# Altium PCB theMonarchTransmitter.PcbDoc
Units mil, origin at the board's own origin, x right, y up, seen from the top; angles counter-clockwise.
Board outline 3835 x 2085 mil, 4 copper layers (Top Layer, GND, 3.3VDC, Bottom Layer), stack 53.912 mil thick; 35 components, 36 nets, 133 pads, 0 vias.
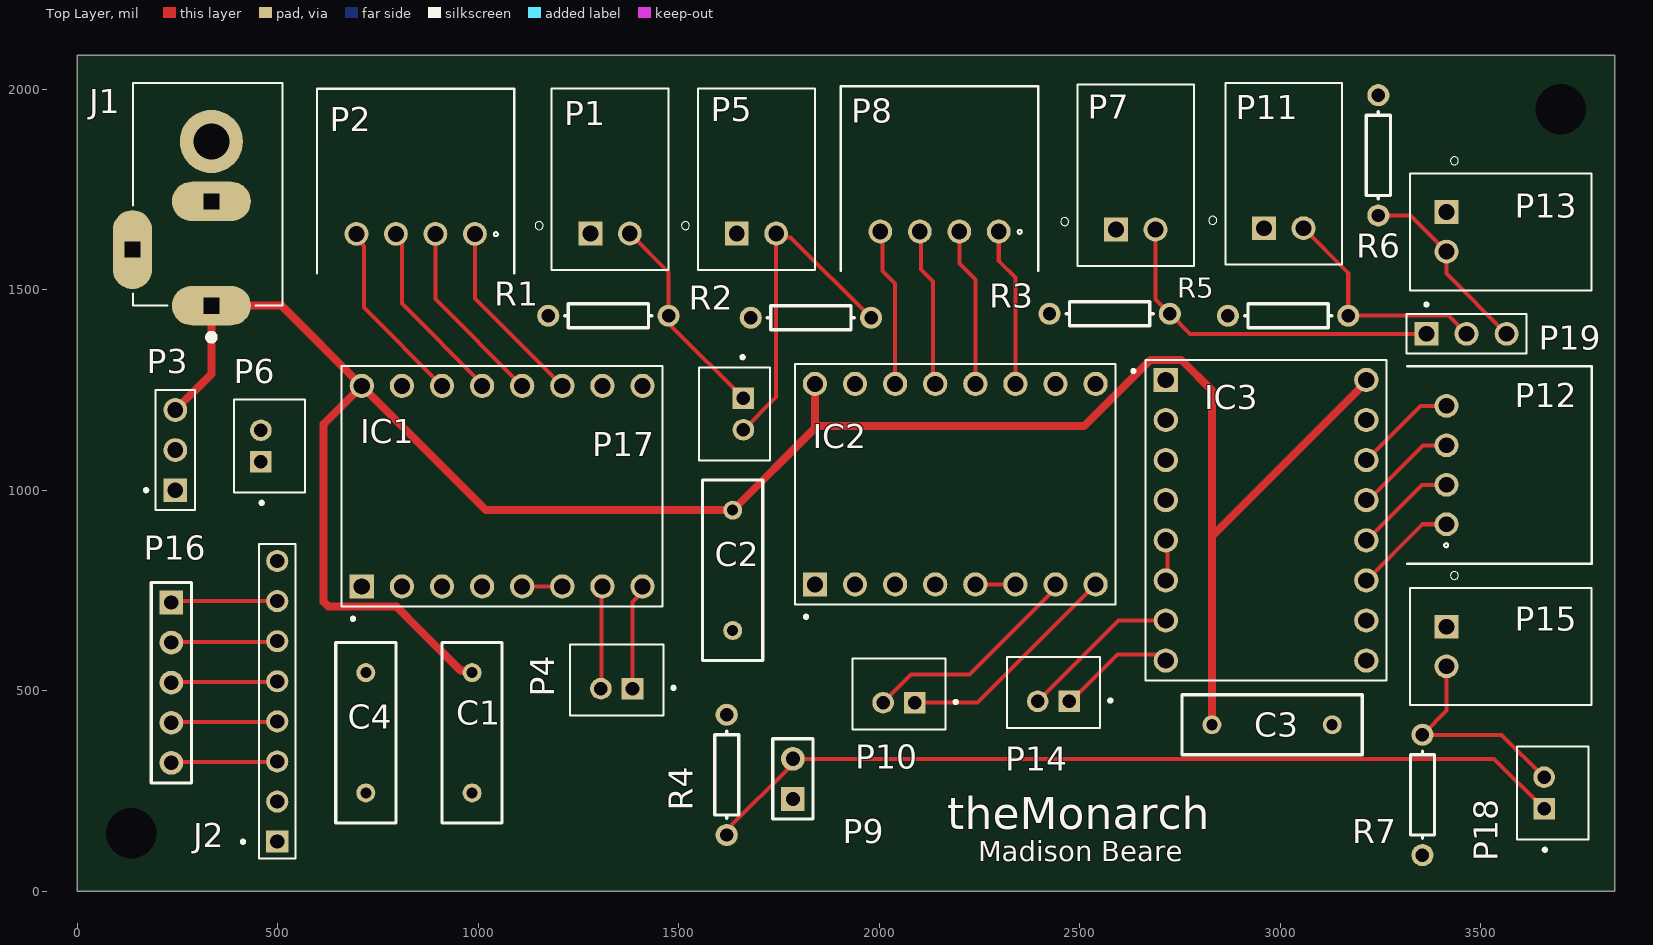
[diagram p0: Top Layer view]
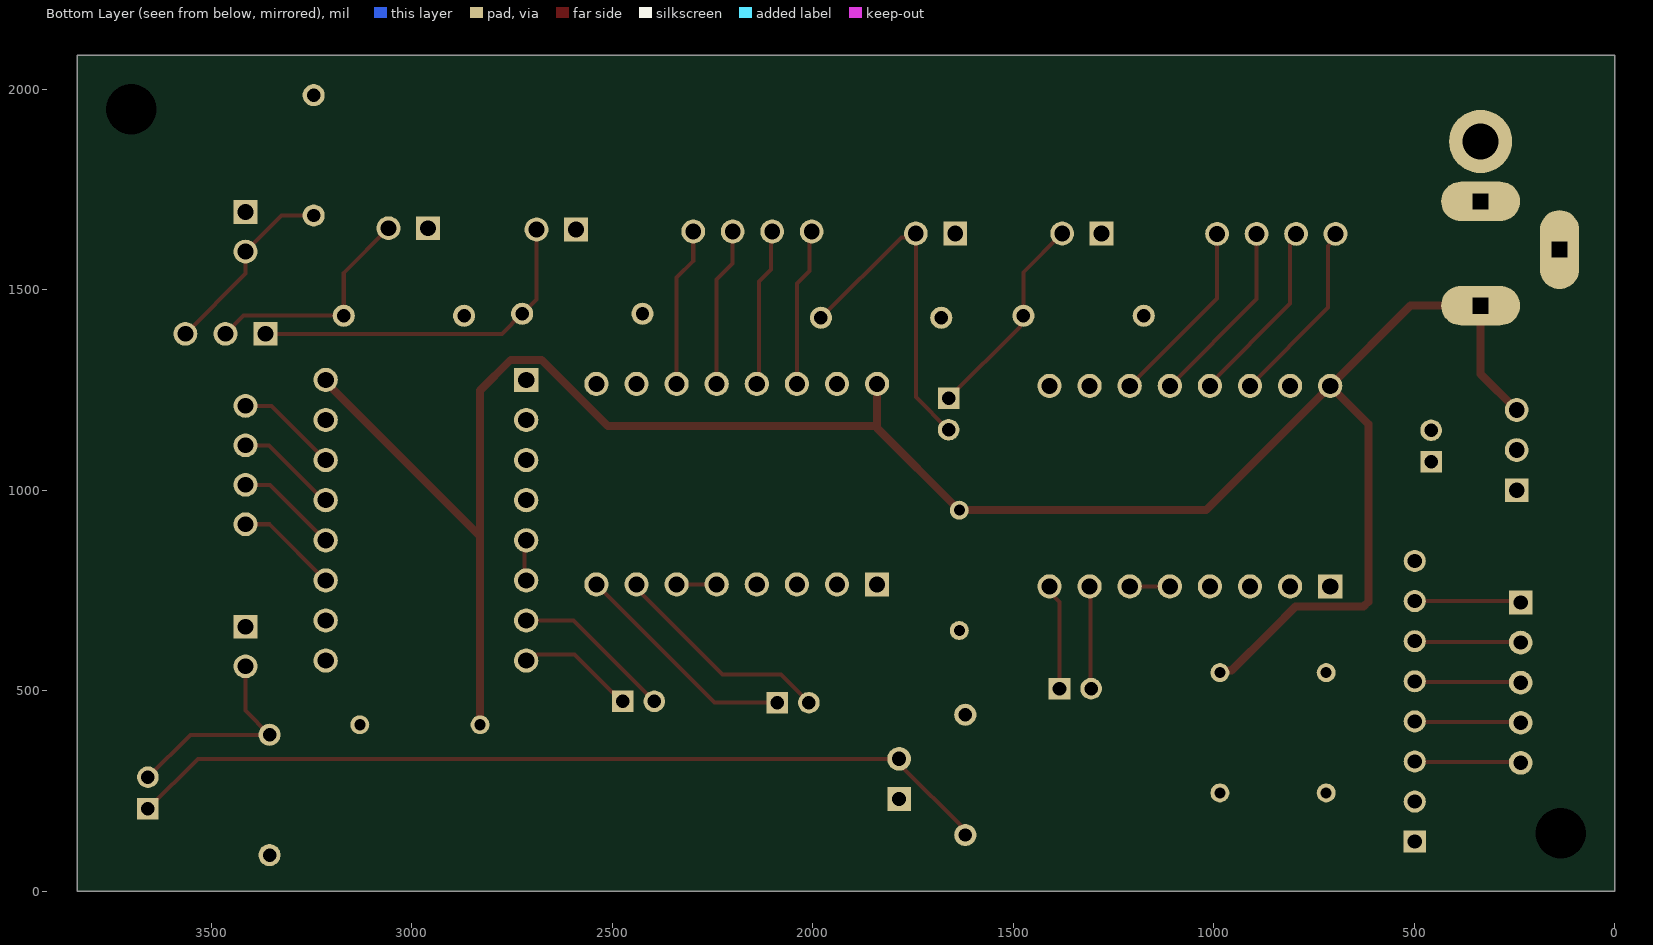
[diagram p1: Bottom Layer view, seen from below]
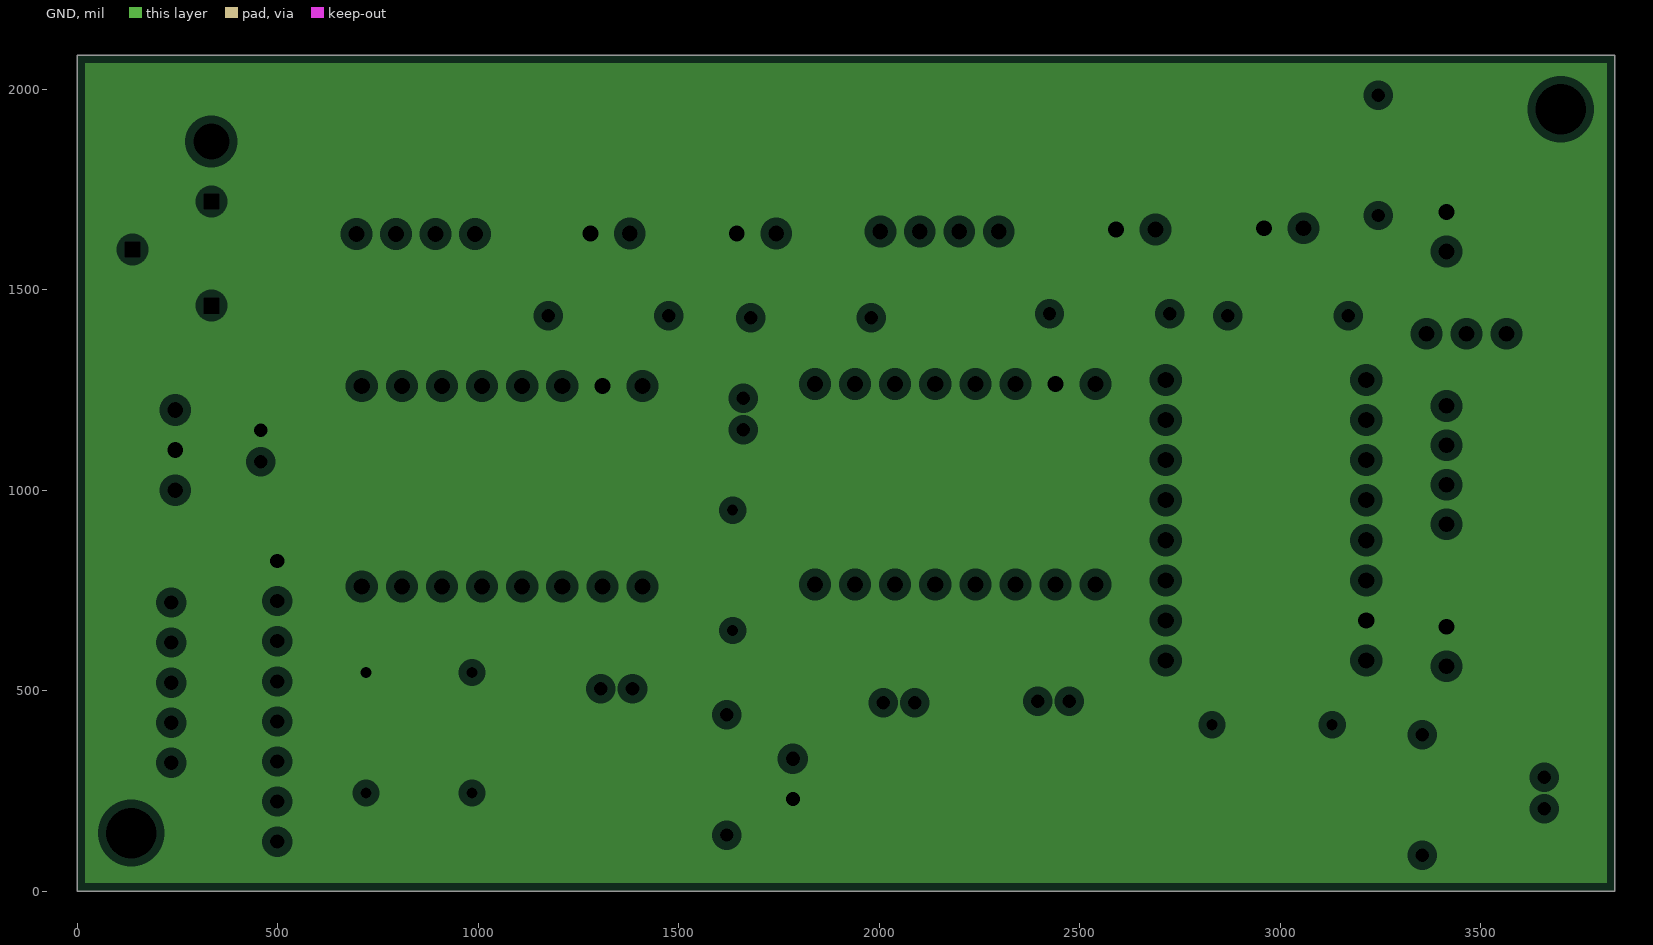
[diagram p2: GND, clearances drawn from the general rule]
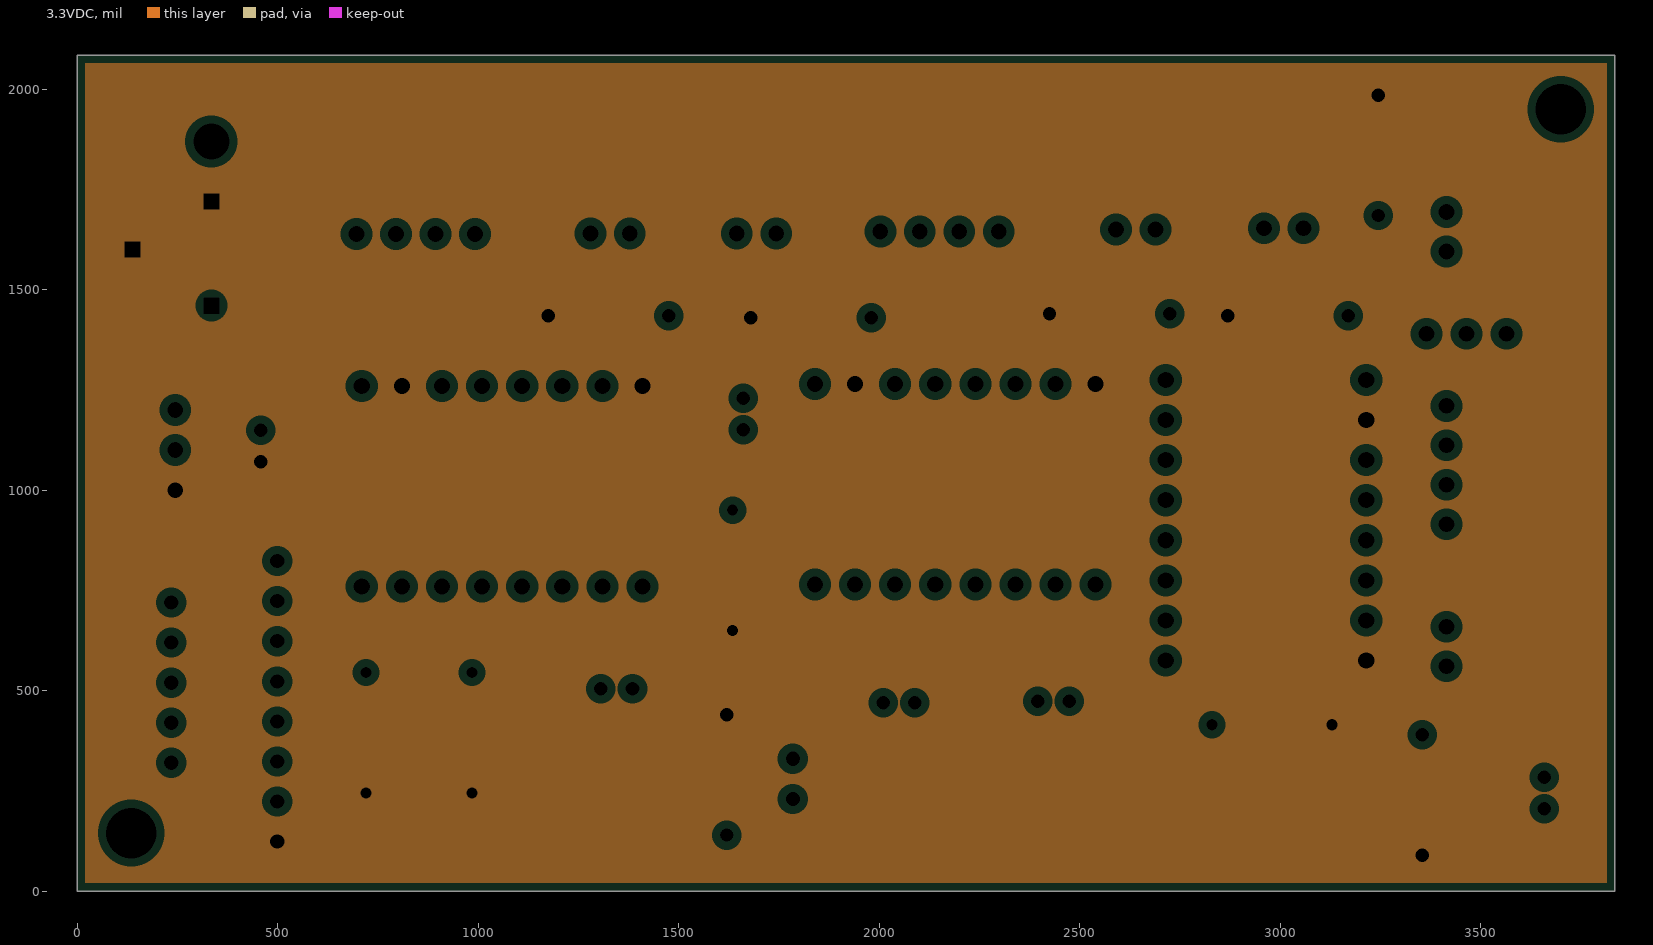
[diagram p3: 3.3VDC, clearances drawn from the general rule]

## Layer stack, top to bottom
Top Solder: solder mask 1, SM-001, Dk 4
Top Layer: signal copper 1.378
Dielectric 1: prepreg 5.1, PP-017, Dk 4.3
Dielectric 2: prepreg 5.1, PP-017, Dk 4.3
GND: plane copper 1.378, net GND
Dielectric 3: core 28, Core-039, Dk 4.8
3.3VDC: plane copper 1.378, net 3.3VDC
Dielectric 4: prepreg 5.1, PP-017, Dk 4.3
Dielectric 5: prepreg 5.1, PP-017, Dk 4.3
Bottom Layer: signal copper 1.378
Bottom Solder: solder mask 1, SM-001, Dk 4

## Board outline
0,0 0,2085 3835,2085 3835,0

## Design rules (kind name [scope] priority, off if disabled: settings)
Clearance [All] p1: gap=10 ignorepadtopadclearanceinfootprint=FALSE except(0: Arc-Hole Track-Hole SMDPad-Hole THPad-Hole Via-Hole Fill-Hole Poly-Hole Region-Hole Text-Hole)
HoleSize [All] p1: absolutevalues=TRUE maxlimit=130 minlimit=1 maxpercent=80.000 minpercent=20.000
PlaneClearance [All] p1: clearance=20
PlaneConnect [All] p1: planeconnectstyle=Relief reliefexpansion=20 reliefentries=4 reliefconductorwidth=10 reliefairgap=10
PolygonConnect [All] p1: connectstyle=Relief reliefconductorwidth=10 reliefentries=4 polygonreliefangle="90 Angle" airgapwidth=10
RoomDefinition theMonarchTransmitter [InComponentClass('theMonarchTransmitter')] p1: confinementstyle=ConfineIn formatcopy=TRUE lockcomponents=FALSE outline 3839.21,2085 -6.42,2085 -6.42,-6.65 3839.21,-6.65
RoutingVias [All] p1: holewidth=11.81 width=23.62 viastyle="Through Hole" minholewidth=11.81 minwidth=23.62 maxholewidth=11.81 maxwidth=23.62
SilkToSolderMaskClearance [IsPad] p1: minsilkscreentomaskgap=7.5 clearancetoexposedcopper=TRUE
SolderMaskExpansion [All] p1: expansion=4 istentingtop=FALSE
Width [All] p1: maxlimit=20 minlimit=10 preferedwidth=10
26 further rules are at their usual default settings.

## Classes and differential pairs
component class theMonarchTransmitter: C1 C2 C3 C4 IC1 IC2 IC3 J1 J2 P1 P2 P3 P5 P6 P7 P8 P9 P11 P12 P13 P15 P16 P17 P18 P19 R1 R2 R3 R4 R5 R6 R7

## Components (designator, comment, footprint, x,y, rotation, side; value= is the part's Value field where it differs from the comment)
C1 "100uF" RAD-0.3 985,395 r270 top value=100pF
C2 "100uF" RAD-0.3 1635,800 r270 top value=100pF
C3 "100uF" RAD-0.3 2980,415 r0 top value=100pF
C4 "10uF" RAD-0.3 720,395 r90 top
IC1 "a4988" MODULE_A4988_STEPPER_MOTOR_DRIVER_CARRIER 1060,1010 r90 top
IC2 "a4988" MODULE_A4988_STEPPER_MOTOR_DRIVER_CARRIER 2190,1015 r90 top
IC3 "a4988" MODULE_A4988_STEPPER_MOTOR_DRIVER_CARRIER 2965,925 r0 top
J1 "FC681478" FC681478 335,1460.16 r90 top
J2 "nRF24L01+" TE_5-146278-8 499.21,473.35 r90 top
P1 "S2B-XH-A" JST_S2B-XH-A(LF)(SN) 1329.21,1640 r0 top
P2 "S4B-XH-A" S4B-XH-A(LF)(SN) 844.37,1638.35 r270 top
P3 "Test" TE_826936-3 245,1100 r90 top
P4 "B2B-PH-K-S" JST_B2B-PH-K-S(LF)(SN) 1345.63,526.65 r0 top
P5 "S2B-XH-A" JST_S2B-XH-A(LF)(SN) 1694.21,1640 r0 top
P6 "B2B-PH-K-S" JST_B2B-PH-K-S(LF)(SN) 480,1110 r270 top
P7 "S2B-XH-A" JST_S2B-XH-A(LF)(SN) 2640,1650 r0 top
P8 "S4B-XH-A" S4B-XH-A(LF)(SN) 2150.79,1644.21 r270 top
P9 "LED" HDR1X2 1785,230 r90 top
P10 "B2B-PH-K-S" JST_B2B-PH-K-S(LF)(SN) 2049.37,491.65 r0 top
P11 "S2B-XH-A" JST_S2B-XH-A(LF)(SN) 3009.21,1653.35 r0 top
P12 "S4B-XH-A" S4B-XH-A(LF)(SN) 3414.21,1062.64 r180 top
P13 "S2B-XH-A" JST_S2B-XH-A(LF)(SN) 3415,1644.21 r270 top
P14 "B2B-PH-K-S" JST_B2B-PH-K-S(LF)(SN) 2435,495 r0 top
P15 "S2B-XH-A" JST_S2B-XH-A(LF)(SN) 3415,610 r270 top
P16 "Header 5" HDR1X5 235,720 r270 top
P17 "2x1 Header" JST_B2B-PH-K-S(LF)(SN) 1640,1190 r90 top
P18 "2x1 Header" JST_B2B-PH-K-S(LF)(SN) 3680,245 r270 top
P19 "3x1 Header" TE_826936-3 3465,1390 r0 top
R1 "Res1" AXIAL-0.3 1325,1435 r180 top value=10K
R2 "Res1" AXIAL-0.3 1830,1430 r180 top value=10K
R3 "Res1" AXIAL-0.3 2575,1440 r180 top value=10K
R4 "Res1" AXIAL-0.3 1620,290 r90 top value=1K
R5 "Res1" AXIAL-0.3 3020,1435 r180 top value=10K
R6 "Res1" AXIAL-0.3 3245,1835 r90 top value=10K
R7 "Res1" AXIAL-0.3 3355,240 r270 top value=10K

## Footprints (in the part's own frame and the unit in brackets; to place one, negate y for a bottom-side part, rotate by r counter-clockwise, add the part's x,y. Pads: shape width x height; smd on the part's side, far side on the other; paste and mask are expansions set on the pad)
AXIAL-0.3 [mm] "Axial Device, Thru-Hole; 2 Leads; 0.3 in Pin Spacing"
  round 1.4 hole 0.85: 1(-3.81,0) 2(3.81,0)
  silkscreen extent -2.77,-0.76 2.77,0.76
FC681478 [mm]
  oval 2.5x5 hole 1 square: 1(0,0) 2(6.6,0)
  round 4 hole 2.3: 1(10.4,0)
  oval 5x2.5 hole 1 square: 3(3.55,5)
  silkscreen extent -2.2,-4.5 14.1,4.95
HDR1X2 [mm] "Connector; Header; 2 Position"
  rect 1.5x1.5 hole 0.9: 1(0,0)
  round 1.5 hole 0.9: 2(2.54,0)
  silkscreen extent -1.27,-1.27 3.81,1.27
HDR1X5 [mm] "Connector; Header; 5 Position"
  rect 1.5x1.5 hole 0.9: 1(0,0)
  round 1.5 hole 0.9: 2(2.54,0) 3(5.08,0) 4(7.62,0) 5(10.16,0)
  silkscreen extent -1.27,-1.27 11.43,1.27
JST_B2B-PH-K-S(LF)(SN) [mm]
  rect 1.368x1.368 hole 0.86: 1(1,-0.55)
  round 1.368 hole 0.86: 2(-1,-0.55)
  silkscreen extent -2.95,-2.25 3.7,2.25
JST_S2B-XH-A(LF)(SN) [mm]
  rect 1.508x1.508 hole 1: 1(-1.25,0)
  round 1.508 hole 1: 2(1.25,0)
  silkscreen extent -4.75,-2.3 3.7,9.2
MODULE_A4988_STEPPER_MOTOR_DRIVER_CARRIER [mm]
  rect 1.53x1.53 hole 1.02: 1(-6.35,8.89)
  round 1.53 hole 1.02: 2(-6.35,6.35) 3(-6.35,3.81) 4(-6.35,1.27) 5(-6.35,-1.27) 6(-6.35,-3.81) 7(-6.35,-6.35) 8(-6.35,-8.89) 9(6.35,-8.89) 10(6.35,-6.35) 11(6.35,-3.81) 12(6.35,-1.27) 13(6.35,1.27) 14(6.35,3.81) 15(6.35,6.35) 16(6.35,8.89)
  silkscreen extent -8.5,-10.16 7.62,10.16
RAD-0.3 [mm] "Radial Cap, Thru-Hole; 2 Leads; 0.3 in Pin Spacing"
  round 1.2 hole 0.7: 1(-3.81,0) 2(3.81,0)
  silkscreen extent -5.71,-1.91 5.71,1.91
S4B-XH-A(LF)(SN) [mm]
  round 1.508 hole 1: 1(-0.02,3.75) 2(-0.02,1.25) 3(-0.02,-1.25) 4(-0.02,-3.75)
  silkscreen extent -9.22,-6.25 2.48,6.25
TE_5-146278-8 [mm]
  rect 1.398x1.398 hole 0.89: 1(-8.89,0)
  round 1.398 hole 0.89: 2(-6.35,0) 3(-3.81,0) 4(-1.27,0) 5(1.27,0) 6(3.81,0) 7(6.35,0) 8(8.89,0)
  silkscreen extent -9.96,-1.17 9.96,2.27
TE_826936-3 [mm]
  rect 1.508x1.508 hole 1: 1(-2.54,0)
  round 1.508 hole 1: 2(0,0) 3(2.54,0)
  silkscreen extent -3.81,-1.25 3.81,1.95

## Part data
C1 C2 C3 C4: library part Cap, "Capacitor", LatestRevisionDate=17-Jul-2002, LatestRevisionNote="Re-released for DXP Platform.", PackageDescription="Radial Cap, Thru-Hole; 2 Leads; 0.3 in Pin Spacing", PackageReference=RAD-0.3, Published=8-Jun-2000, Publisher="Altium Limited"
J1: "CLIFF ELECTRONIC COMPONENTS         FC681478            CONNECTOR, POWER ENTRY, RCPT, 2A, 16VDC", Color=Black, Current Rating=2A, Manufacturer=Cliff, Supplier Part Number 1=2450496, Voltage Rating=16V, Category=Connectors, ComponentLink1Description=https://datasheet.ciiva.com/46428/1859070-46428805.pdf?src-supplier=Element14, ComponentLink1URL=https://datasheet.ciiva.com/46428/1859070-46428805.pdf?src-supplier=Element14, Gender=Male, Length=15.2mm, Manufacturer Part Number=FC681478, Mount="Through Hole", Orientation="Right Angle", Pricing 1="1=1.94000, 50=0.87800, 100=0.78800, 250=0.70300, 500=0.66600, 1000=0.65500 (GBP)", REACH SVHC="No SVHC", RoHS=Yes, Stock 1=534, Supplier 1=Farnell, Termination="Through Hole", Voltage Rating (DC)=16V, Width=9mm
J2: library part WRL-00691, "SPARKFUN TRANSCEIVER BREAKOUT -", Frequency=2.4GHz, Manufacturer=SparkFun, Supplier Part Number 1=1568-1295-ND, Category="RF Semiconductors and Devices", ComponentLink1Description=https://github.com/sparkfun/Transceiver_Breakout-nRF24L01/tree/V_1.3?src-supplier=Digi-Key, ComponentLink1URL=https://github.com/sparkfun/Transceiver_Breakout-nRF24L01/tree/V_1.3?src-supplier=Digi-Key, Manufacturer Part Number=WRL-00691, Pricing 1="1=20.95000 (USD)", RoHS=No, Stock 1=59, Supplier 1=Digi-Key
P1 P5 P7 P9 P11 P13 P15 P17 P18: library part S2B-XH-A(LF)(SN), "Conn Shrouded Header HDR 2 POS 2.5mm Solder RA Thru-Hole Box", Color=Natural, Contact Resistance=20mR, Current Rating=3A, Housing Color=White, Insulation Resistance=1GR, Manufacturer=JST, Max Operating Temperature=85°C, Max Voltage Rating (AC)=250V, Min Operating Temperature=-25°C, Package Quantity=1000, Supplier Part Number 1=455-2257-ND, Category="Headers and Wire Housings", ComponentLink1Description=https://datasheet.ciiva.com/16208/s2b-xh-alfsn-16208978.pdf?src-supplier=Future+Electronics, ComponentLink1URL=https://datasheet.ciiva.com/16208/s2b-xh-alfsn-16208978.pdf?src-supplier=Future+Electronics, ComponentLink2Description=https://datasheet.ciiva.com/8052/1684882-8052211.pdf?src-supplier=Element14, ComponentLink2URL=https://datasheet.ciiva.com/8052/1684882-8052211.pdf?src-supplier=Element14, ComponentLink3Description=https://datasheet.ciiva.com/11746/0900766b8082f560-11746947.pdf?src-supplier=RSComponents, ComponentLink3URL=https://datasheet.ciiva.com/11746/0900766b8082f560-11746947.pdf?src-supplier=RSComponents, ComponentLink4Description=https://datasheet.ciiva.com/26924/getdatasheetpartid-645395-26924076.pdf?src-supplier=Verical, ComponentLink4URL=https://datasheet.ciiva.com/26924/getdatasheetpartid-645395-26924076.pdf?src-supplier=Verical, ComponentLink5Description=https://datasheet.ciiva.com/26894/getdatasheetpartid-640270-26894603.pdf?src-supplier=Verical, ComponentLink5URL=https://datasheet.ciiva.com/26894/getdatasheetpartid-640270-26894603.pdf?src-supplier=Verical, ComponentLink6Description=https://datasheet.ciiva.com/26894/getdatasheetpartid-441330-26894909.pdf?src-supplier=Verical, ComponentLink6URL=https://datasheet.ciiva.com/26894/getdatasheetpartid-441330-26894909.pdf?src-supplier=Verical, ComponentLink7Description=https://datasheet.ciiva.com/20207/523653-20207183.pdf?src-supplier=Rapid+Electronics, ComponentLink7URL=https://datasheet.ciiva.com/20207/523653-20207183.pdf?src-supplier=Rapid+Electronics, ComponentLink8Description=https://datasheet.ciiva.com/726/exh-726412.pdf?src-supplier=Digi-Key, ComponentLink8URL=https://datasheet.ciiva.com/726/exh-726412.pdf?src-supplier=Digi-Key, Connector Type="Male Pin", Contact Material=Brass, Contact Plating=Tin,Copper,Lead, Depth=11.5mm, Gender=Male, Housing Material=Polyamide, Lead Free="Lead Free", Lead Pitch=2.5mm, Length=7.4mm, Manufacturer Part Number=S2B-XH-A(LF)(SN), Max Current Rating=3A, Max Voltage Rating (DC)=250V, Mount="Through Hole", Number of Contacts=2, Number of Positions=2, Number of Rows=1, Orientation="Right Angle", Packaging=Bulk, Pitch=2.5mm, Pricing 1="1=0.18000, 10=0.16800, 100=0.11710, 500=0.09904, 1000=0.08104, 5000=0.07204, 10000=0.06528 (USD)", REACH SVHC="No SVHC", RoHS=Yes, Stock 1=54562, Supplier 1=Digi-Key, Termination=Press-Fit, Voltage Rating=250V, Voltage Rating (AC)=250V, Wire/Cable Gauge=22AWG
P2 P8 P12: library part S4B-XH-A(LF)(SN), "Conn Shrouded Header HDR 4 POS 2.5mm Solder RA Thru-Hole Box", Color=Natural, Contact Resistance=20mR, Current Rating=3A, Housing Color=White, Insulation Resistance=1GR, Manufacturer=JST, Max Operating Temperature=85°C, Max Voltage Rating (AC)=250V, Min Operating Temperature=-25°C, Package Quantity=500, Supplier Part Number 1=455-2243-ND, Category="Headers and Wire Housings", ComponentLink1Description=https://datasheet.ciiva.com/726/exh-726400.pdf?src-supplier=Digi-Key, ComponentLink1URL=https://datasheet.ciiva.com/726/exh-726400.pdf?src-supplier=Digi-Key, ComponentLink2Description=https://datasheet.ciiva.com/26924/getdatasheetpartid-449045-26924078.pdf?src-supplier=Verical, ComponentLink2URL=https://datasheet.ciiva.com/26924/getdatasheetpartid-449045-26924078.pdf?src-supplier=Verical, ComponentLink3Description=https://datasheet.ciiva.com/8052/5448-8052236.pdf?src-supplier=Element14, ComponentLink3URL=https://datasheet.ciiva.com/8052/5448-8052236.pdf?src-supplier=Element14, Connector Type="Male Pin", Contact Material=Brass, Contact Plating=Tin,Lead,Copper, Depth=11.5mm, Gender=Male, Housing Material=Polyamide, Lead Free="Lead Free", Lead Pitch=2.5mm, Length=12.4mm, Manufacturer Part Number=S4B-XH-A(LF)(SN), Max Current Rating=3A, Mount="Through Hole", Number of Contacts=4, Number of Positions=4, Number of Rows=1, Orientation="Right Angle", Packaging=Bulk, Pitch=2.5mm, Pricing 1="1=0.27000, 10=0.25700, 100=0.17850, 500=0.15100, 1000=0.12355, 5000=0.10982, 10000=0.09953 (USD)", REACH SVHC="No SVHC", RoHS=Yes, Stock 1=8950, Supplier 1=Digi-Key, Termination=Press-Fit, Voltage Rating=250V, Voltage Rating (AC)=250V, Wire/Cable Gauge=22AWG
P3 P19: library part Test_Header
P4 P6 P10 P14: library part B2B-PH-K-S(LF)(SN), "Connector Header, PH Series, 2 Position, 2.00mm, Through Hole, Press-Fit, Solder, Natural", Manufacturer=JST, Supplier Part Number 1=455-1704-ND, Category=Connectors, ComponentLink1Description=http://www.farnell.com/datasheets/2057211.pdf?src-supplier=Farnell, ComponentLink1URL=http://www.farnell.com/datasheets/2057211.pdf?src-supplier=Farnell, ComponentLink2Description=http://www.farnell.com/datasheets/2057211.pdf?src-supplier=Newark, ComponentLink2URL=http://www.farnell.com/datasheets/2057211.pdf?src-supplier=Newark, ComponentLink3Description=http://www.farnell.com/datasheets/2057211.pdf?src-supplier=Element14, ComponentLink3URL=http://www.farnell.com/datasheets/2057211.pdf?src-supplier=Element14, Height=0.35inch, Length=0.2inch, Manufacturer Part Number=B2B-PH-K-S(LF)(SN), Pricing 1="1=0.17000, 10=0.16200, 100=0.10020, 500=0.08288, 1000=0.07252, 5000=0.06216, 10000=0.06044 (USD)", RoHS=Yes, Stock 1=37001, Supplier 1=Digi-Key, Weight=0.0625lb, Width=0.24inch
P16: "Header, 5-Pin", LatestRevisionDate=17-Jul-2002, LatestRevisionNote="Re-released for DXP Platform.", Publisher="Altium Limited"
R1 R2 R3 R4 R5 R6 R7: "Resistor", LatestRevisionDate=17-Jul-2002, LatestRevisionNote="Re-released for DXP Platform.", PackageDescription="Axial Device, Thru-Hole; 2 Leads; 0.3 in Pin Spacing", PackageReference=AXIAL-0.3, Published=8-Jun-2000, Publisher="Altium Limited"
IC1 IC2 IC3: ComponentLink1Description="New link"

## Free pads (board coordinates)
  round 60 hole 125.98 unplated: 2(135,145) 3(3700,1950)

## Nets (pads, with @x,y where several pads share a name; then routed paths per layer and width w, separated by ;. In a path a pad name is that pad's centre, name@x,y a point inside that pad or via, vN(x,y) a via of type N, cw(c..) or ccw(c..) an arc to the next point about the centre after c; other vN are vias at no path point)
3.3VDC: C4.2 IC1.10 IC2.10 IC3.10 J2.8 P1.1 P3.2 P5.1 P6.2 P7.1 P9.1 P11.1 P13.1 P15.1
12VDC: C1.1 C2.1 C3.1 IC1.16 IC2.16 IC3.16 J1.1@335,1460.16 P3.3 | length 5702.8
  Top Layer w20: P3.3 335,1290 335,1460.16 509.84,1460.16 IC1.16 ; C1.1 979.79,550.21 955.98,550.21 855.79,650.4 796.19,710 748.52,710 748.4,709.88 626.72,709.88 615,721.6 615,1165 IC1.16 ; 1840,1160 2511.48,1160 2676.6,1325.12 2753.4,1325.12 2830,1248.52 2830,885 ; IC2.16 1840,1155 C2.1 1020,950 IC1.16 ; C3.1 2830,885 ; IC3.16 3215,1270 2830,885
GND: C1.2 C2.2 C3.2 C4.1 IC1.9 IC1.15 IC2.9 IC2.15 IC3.9 IC3.15 J1.2 J1.3 J2.1 P3.1 P6.1 R1.2 R2.2 R3.2 R4.2 R5.2 R6.2 R7.2
NetIC1_5: IC1.5 IC1.6 | length 100
  Top Layer w10: IC1.5 IC1.6
NetIC1_7: IC1.7 P4.2 | length 256.5
  Top Layer w10: P4.2 1308.13,506.87 1308.13,758.13 IC1.7
NetIC1_8: IC1.8 P4.1 | length 265.4
  Top Layer w10: P4.1 1385,721.41 1410,746.41 IC1.8
NetIC1_11: IC1.11 P2.1 | length 469.4
  Top Layer w10: P2.1 992.01,1477.99 IC1.11
NetIC1_12: IC1.12 P2.2 | length 468.8
  Top Layer w10: P2.2 893.58,1476.42 IC1.12
NetIC1_13: IC1.13 P2.3 | length 468.1
  Top Layer w10: P2.3 795.16,1625.77 810,1610.93 810,1465 1010,1265 IC1.13
NetIC1_14: IC1.14 P2.4 | length 467.5
  Top Layer w10: P2.4 696.73,1626.86 715,1608.59 715,1455 IC1.14
NetIC2_5: IC2.5 IC2.6 | length 100
  Top Layer w10: IC2.5 IC2.6
NetIC2_7: IC2.7 P10.2 | length 558.1
  Top Layer w10: P10.2 2080,540 2225,540 2440,755 IC2.7
NetIC2_8: IC2.8 P10.1 | length 573.5
  Top Layer w10: P10.1 2245,470 IC2.8
NetIC2_11: IC2.11 P8.1 | length 397.2
  Top Layer w10: P8.1 2298.43,1571.57 2340,1530 IC2.11
NetIC2_12: IC2.12 P8.2 | length 396.6
  Top Layer w10: P8.2 2200,1565 2240,1525 IC2.12
NetIC2_13: IC2.13 P8.3 | length 395.9
  Top Layer w10: P8.3 2105,1641.57 2105,1550 2135,1520 2135,1270 IC2.13
NetIC2_14: IC2.14 P8.4 | length 395.3
  Top Layer w10: P8.4 2008.17,1639.98 2008.17,1546.83 2040,1515 IC2.14
NetIC3_5: IC3.5 IC3.6 | length 100
  Top Layer w10: IC3.6@2719.21,773.35 IC3.5@2719.21,873.35
NetIC3_7: IC3.7 P14.2 | length 402.9
  Top Layer w10: P14.2 2597.28,675 IC3.7
NetIC3_8: IC3.8 P14.1 | length 295.2
  Top Layer w10: P14.1 2496.3,495.28 2500.28,495.28 2595,590 2686.41,590 2701.41,575 IC3.8
NetIC3_11: IC3.11 P12.1 | length 258
  Top Layer w10: IC3.11 3355,915 P12.1
NetIC3_12: IC3.12 P12.2 | length 257.3
  Top Layer w10: IC3.12 3353.43,1013.43 P12.2
NetIC3_13: IC3.13 P12.3 | length 256.7
  Top Layer w10: IC3.13 3220,975 3356.85,1111.85 P12.3
NetIC3_14: IC3.14 P12.4 | length 256
  Top Layer w10: IC3.14 3350.28,1210.28 P12.4
NetJ2_3: J2.3 P16.5 | length 265.6
  Top Layer w10: P16.5 236.67,321.67 497.54,321.67 J2.3
NetJ2_4: J2.4 P16.4 | length 265.6
  Top Layer w10: P16.4 236.67,421.67 497.54,421.67 J2.4
NetJ2_5: J2.5 P16.3 | length 265.6
  Top Layer w10: P16.3 236.67,521.67 497.54,521.67 J2.5
NetJ2_6: J2.6 P16.2 | length 265.6
  Top Layer w10: P16.2 236.67,621.67 497.54,621.67 J2.6
NetJ2_7: J2.7 P16.1 | length 265.6
  Top Layer w10: P16.1 238.35,723.35 J2.7
NetP1_2: P1.2 P17.1 R1.1 | length 527.9
  Top Layer w10: P1.2 1475,1543.43 R1.1 1483.63,1426.37 1483.63,1407.39 P17.1
NetP5_2: P5.2 P17.2 R2.1 | length 846.8
  Top Layer w10: P17.2 1743.43,1232.4 P5.2 1752.87,1630.55 1779.45,1630.55 R2.1
NetP7_2: P7.2 P19.1 R3.1 | length 885.5
  Top Layer w10: P7.2 2689.21,1475.79 R3.1 2775,1390 P19.1
NetP9_2: P9.2 P18.1 R4.1 | length 2183.2
  Top Layer w10: R4.1 1620,152.21 1785,317.21 P9.2 3533.98,330 P18.1
NetP11_2: P11.2 P19.2 R5.1 | length 578.2
  Top Layer w10: P11.2 3170,1541.77 R5.1 3420,1435 P19.2
NetP13_2: P13.2 P19.3 R6.1 | length 474.4
  Top Layer w10: R6.1 3325,1685 P13.2 3415,1540 P19.3
NetP15_2: P15.2 P18.2 R7.1 | length 542.7
  Top Layer w10: P15.2 3415,450 R7.1 3552.72,390 P18.2
pads on no net: IC1.1 IC1.2 IC1.3 IC1.4 IC2.1 IC2.2 IC2.3 IC2.4 IC3.1 IC3.2 IC3.3 IC3.4 J1.1@335,1869.61 J2.2

## Polygon pours and split planes (outlines as drawn)
no net on Bottom Layer "NONET_L04_P001" (solid, pour order 1): 115,845
3.3VDC on GND (split plane): 3814.9,20.1 20.1,20.1 20.1,2064.9 3814.9,2064.9
GND on 3.3VDC (split plane): 3814.9,20.1 20.1,20.1 20.1,2064.9 3814.9,2064.9

## Silkscreen, mask and mechanical layers (free items; w line width, h text height)
Top Overlay:
  text "theMonarch" at 2170.03,155 h80
  text "Madison Beare" at 2247.6,75 h50